# EAGLE board mono (EAGLE 6.2)
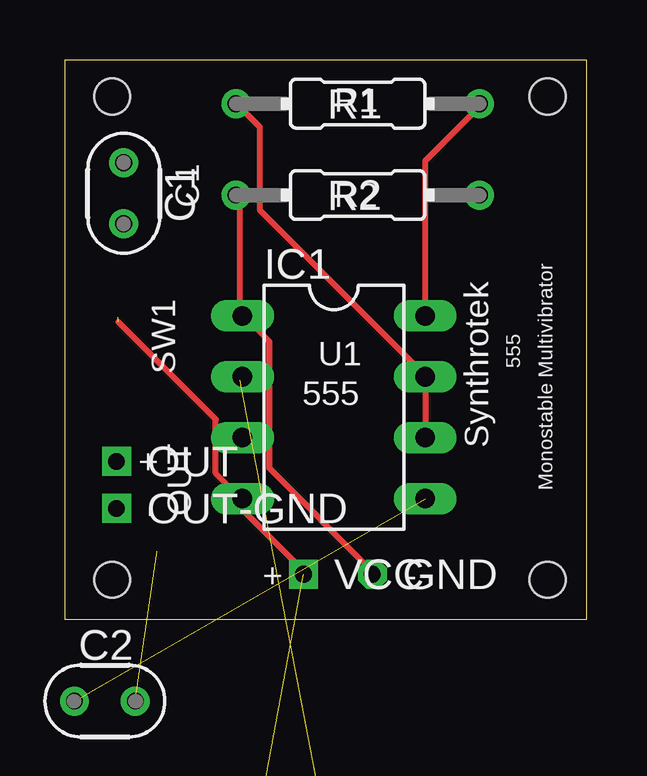
[diagram p0: board, top side]
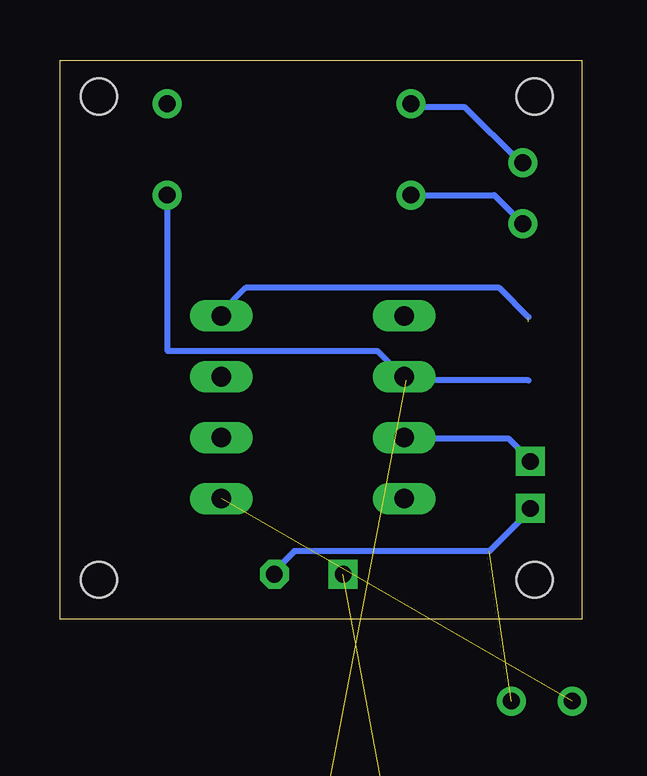
[diagram p1: board, bottom side, seen from below]

Size 21.77 x 23.31 mm. Coordinates in mm from the lower left corner, seen from the top.
Outline: 0,0 21.77,0 21.77,23.31 0,23.31 0,0
Copper layers (1*16): Top 0.035mm / dielectric 1.5mm / Bottom 0.035mm
Design rules: minimum track width 10mil, minimum drill 24mil, track to track 8mil, track to pad 8mil, pad to pad 8mil, via to via 8mil, smd to smd 8mil, copper to edge 40mil, drill to drill 8mil, minimum pad ring 10mil, minimum via ring 8mil, stop-mask expansion 4mil, vias tented up to drill 0mil, thermal gap 10mil
Holes 1.5 mm at 1.98,21.79 20.14,21.79 20.14,1.65 1.98,1.65

## Footprints (pad centres in the part's own frame; a part is rotated, then mirrored left to right if it is on the bottom)
050X030_025 = drill 0.7: 1 -1.27,0; 2 1.27,0
OCTOGON = drill 0.7 octagon: 1 0,0
DIL-08 = drill 0.813 long: 1 -3.81,-3.81; 2 -1.27,-3.81; 3 1.27,-3.81; 4 3.81,-3.81; 5 3.81,3.81; 6 1.27,3.81; 7 -1.27,3.81; 8 -3.81,3.81
SQUARE = drill 0.7 square: 1 0,0
R0207/4 = drill 0.7: 1 -5.08,0; 2 5.08,0
SPST_TOGGLE_SWITCH = drill 3.2: A 0,0; B 4.7,0

## Placement (x,y rotation side)
C1  0.1uF  [050X030_025]  2.46,17.75 270 top
C2  0.01uF  [050X030_025]  1.68,-3.4 0 top  (outside the outline)
GND  [OCTOGON]  12.83,1.88 0 top
IC1  NE555  [DIL-08]  11.23,8.84 270 top
OUT  [SQUARE]  2.16,6.58 0 top
OUT-GND  [SQUARE]  2.16,4.62 0 top
R1  1M  [R0207/4]  12.22,21.49 0 top
R2  10k  [R0207/4]  12.22,17.68 0 top
SW1  SPST_SWITCH  [SPST_TOGGLE_SWITCH]  7.11,-13.56 0 top  (outside the outline)
VCC  [SQUARE]  9.96,1.88 0 top

## Library data of the parts
C1 C2 = gm-caps-ceramic
GND OUT OUT-GND VCC = gm-supply
IC1 = st-microelectronics; MF: Arrow Electronics; MPN: NE555N; OC_FARNELL: 1467742; OC_NEWARK: 89K1486
R1 R2 = gm-resistors
SW1 = 00_steve

## Nets
N$1: C1.1 IC1.6 IC1.7 R1.1
N$2: IC1.3 OUT.1
N$3: IC1.4 IC1.8 R1.2 SW1.A VCC.1
N$4: IC1.2 R2.2 SW1.B
N$5: C2.1 IC1.5
N$7: C1.2 C2.2 GND.1 IC1.1 OUT-GND.1 R2.1

## Tracks (layer width: path | path; a pad name or v marks a point on that pad's centre or on a via)
N$1
  Top 0.254: IC1.6 IC1.7 15.04,10.16 8.13,17.07 8.13,20.52 7.32,21.34 R1.1
  Bottom 0.254: C1.1 2.64,19.1 4.88,21.34 7.11,21.34 R1.1
N$2
  Bottom 0.254: OUT.1 2.23,6.71 3.05,7.52 7.32,7.52 IC1.3
N$3  (2 unrouted)
  Top 0.254: R1.2 17.27,21.34 15.04,19.1 IC1.8 | 2.23,12.39 6.3,8.33 6.3,6.1 7.32,5.08 IC1.4 7.52,4.88 7.52,4.47 9.96,2.03 VCC.1
  Bottom 0.254: 2.23,12.6 3.45,13.82 14.02,13.82 15.04,12.8 IC1.8
N$4  (1 unrouted)
  Bottom 0.254: 2.23,9.96 7.32,9.96 IC1.2 7.52,10.16 8.53,11.18 17.27,11.18 17.27,17.68 R2.2
N$5  (1 unrouted)
N$7  (1 unrouted)
  Top 0.254: GND.1 12.8,2.03 8.53,6.3 8.53,11.58 7.52,12.6 IC1.1 7.32,12.8 7.32,17.68 R2.1
  Bottom 0.254: C1.2 3.66,17.68 R2.1 | OUT-GND.1 2.23,4.47 3.86,2.85 11.99,2.85 12.8,2.03 GND.1

## Text on the board
tPlace: R1 | C1 | R2 | U1 | SW1 | 555 | 555 | Synthrotek | + | Monostable Multivibrator | - | OUT | + | -